# Altium PCB radarr.PcbDoc (part 2 of 3)
Units mm, origin at the board's own origin, x right, y up, seen from the top; angles counter-clockwise.
Board outline 98.42 x 99.44 mm, 4 copper layers (Top Layer, Signal Layer 1, Signal Layer 2, Bottom Layer), stack 1.596 mm thick; 146 components, 99 nets, 534 pads, 3373 vias.
Unrouted connection lines stored in the file: 90.
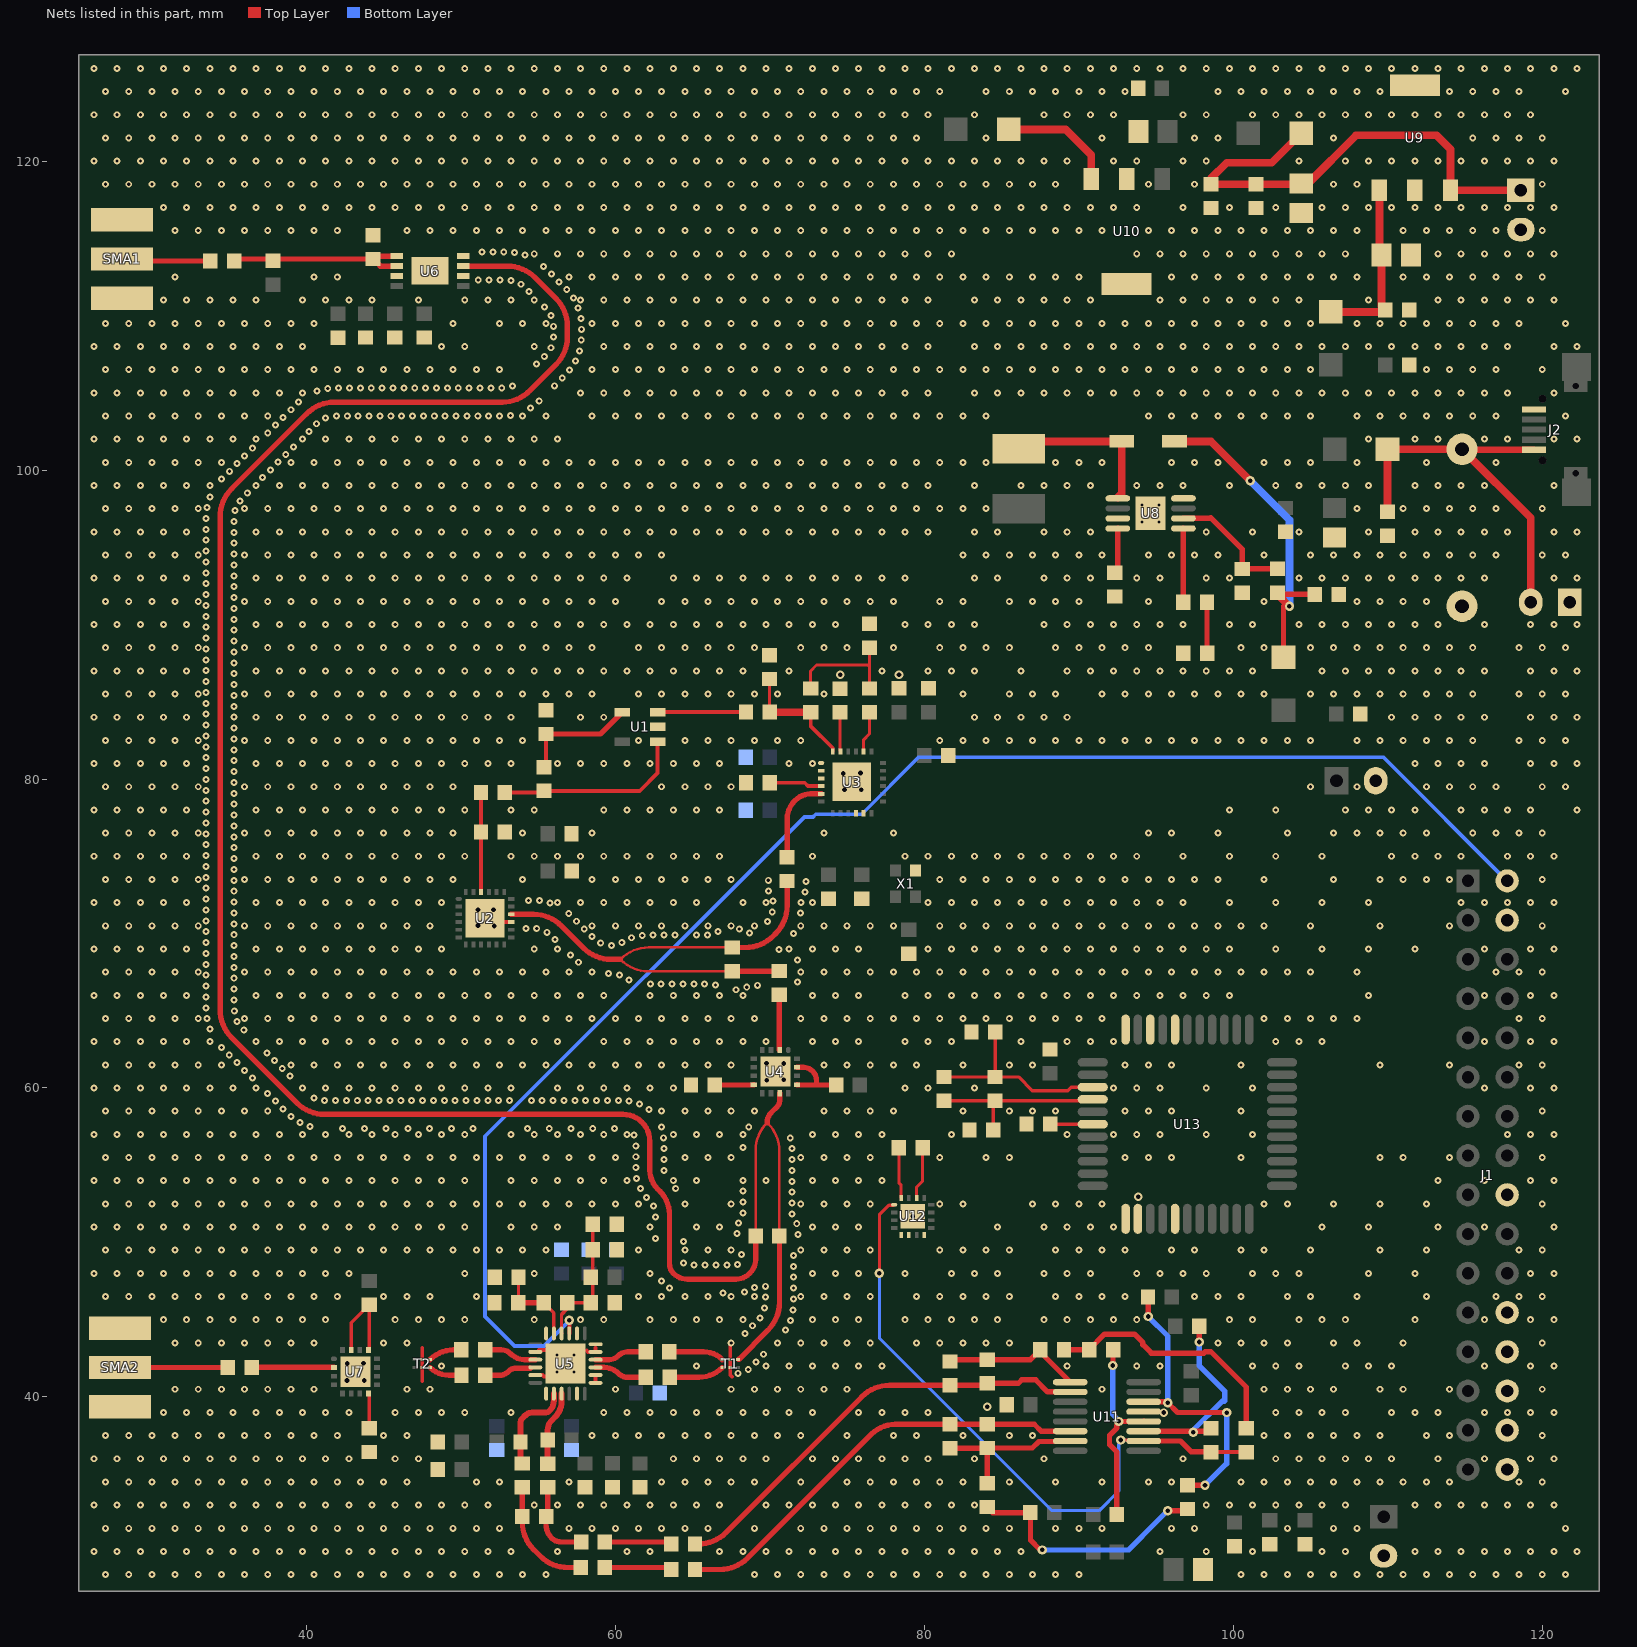
[diagram p4: the nets of this part, all layers, seen from the top]

## Via types
v1: diameter 0.45, hole 0.2, Top Layer to Bottom Layer, tented both sides, 3291 vias
v2: diameter 0.6, hole 0.3, Top Layer to Bottom Layer, tented both sides, 51 vias
v3: diameter 0.559, hole 0.305, Top Layer to Bottom Layer, tented both sides, 23 vias
v4: diameter 0.5, hole 0.2, Top Layer to Bottom Layer, 8 vias

## Nets (pads, with @x,y where several pads share a name; then routed paths per layer and width w, separated by ;. In a path a pad name is that pad's centre, name@x,y a point inside that pad or via, vN(x,y) a via of type N, cw(c..) or ccw(c..) an arc to the next point about the centre after c; other vN are vias at no path point) (continued)
GND: C2.2 C3.2 C4.2 C5.2 C6.1 C9.2 C10.2 C11.2 C12.2 C13.2 C16.1 C17.1 C18.2 C19.2 C21.1 C22.1 C23.2 C25.1 C26.1 C27.1 C28.1 C30.1 C31.1 C32.1 C33.1 C34.1 C35.1 C36.1 C37.1 C39.1 C40.1 C41.2 C42.2 C43.2 C44.2 C45.2 C46.2 C47.2 C48.2 C49.2 C50.2 C51.2 C52.2 C53.2 C54.2 C55.2 C56.2 C57.2 C58.2 C69.2 C70.2 C73.2 C74.1 C75.1 C76.2 D2.A J1.18 J1.25 J1.28 J1.29 J1.30 J1.31 J1.32 J2.5 J3.1 J4.2 J5.2 J6.2 R1.2 R4.1 R9.1 R10.2 R17.2 R18.2 R20.2 R22.2 R35.1 SMA1.2 SMA1.3 SMA2.2 SMA2.3 T1.2 T1.5 T2.2 T2.5 U1.2 U2.15 U2.25 U3.1 U3.2 U3.3 U3.10 U3.11 U3.25 U4.17 U5.1 U5.2 U5.5 U5.6 U5.8 U5.12 U5.14 U5.17 U5.19 U5.23 U5.25 U6.2 U6.4 U6.7 U6.9 U7.17 U8.4 U8.7 U8.9 U9.2 U9.4 U10.2 U10.4 U11.13 U12.5 U12.6 U12.8 U12.17 U13.1 U13.2 U13.5 U13.29 U13.31 U13.33 X1.2 | length 12.2
  Top Layer w0: 58.719,43.18 U5.6@58.719,43.414
  Top Layer w0.25: 47.498,41.021 T2.2@47.498,41.91 T2.5@47.498,42.418 47.498,43.18 ; U2.25@51.562,70.993 51.812,70.743 U2.15@53.262,70.743 ; U5.17@54.819,41.414 55.299,41.414 55.388,41.325 55.93,41.325 U5.25@56.769,42.164 v4(56.219,42.714) 55.882,43.051 55.038,43.051 ; 58.15,43.003 58.239,42.914 U5.5@58.719,42.914 58.719,43.18 ; U5.1@58.719,40.914 U5.2@58.719,41.414 ; v1@67.437,43.307 T1.2@67.437,42.418 T1.5@67.437,41.91 67.437,41.427 67.556,41.308
  Top Layer w0.381: U13.2@93.828,51.533 U13.2@93.908,51.614
  other v1: 27,28.5 28.5,28.5 30,28.5 31.5,28.5 33,28.5 34.5,28.5 36,28.5 37.5,28.5 39,28.5 40.5,28.5 42,28.5 43.5,28.5 45,28.5 46.5,28.5 48,28.5 49.5,28.5 51,28.5 52.5,28.5 54,28.5 55.5,28.5 69,28.5 70.5,28.5 72,28.5 73.5,28.5 75,28.5 76.5,28.5 78,28.5 79.5,28.5 81,28.5 82.5,28.5 84,28.5 85.5,28.5 87,28.5 88.5,28.5 90,28.5 100.5,28.5 102,28.5 103.5,28.5 105,28.5 106.5,28.5 108,28.5 109.5,28.5 111,28.5 112.5,28.5 114,28.5 115.5,28.5 117,28.5 118.5,28.5 120,28.5 121.5,28.5 26.25,30 27.75,30 29.25,30 30.75,30 32.25,30 33.75,30 35.25,30 36.75,30 38.25,30 39.75,30 41.25,30 42.75,30 44.25,30 45.75,30 47.25,30 48.75,30 50.25,30 51.75,30 53.25,30 56.25,30 60.75,30 62.25,30 66.75,30 68.25,30 69.75,30 71.25,30 72.75,30 74.25,30 75.75,30 77.25,30 78.75,30 80.25,30 81.75,30 83.25,30 84.75,30 86.25,30 95.25,30 98.25,30 101.25,30 105.75,30 107.25,30 111.75,30 113.25,30 114.75,30 116.25,30 117.75,30 119.25,30 120.75,30 122.25,30 27,31.5 28.5,31.5 30,31.5 31.5,31.5 33,31.5 34.5,31.5 36,31.5 37.5,31.5 39,31.5 40.5,31.5 42,31.5 43.5,31.5 45,31.5 46.5,31.5 48,31.5 49.5,31.5 51,31.5 52.5,31.5 57,31.5 58.5,31.5 60,31.5 61.5,31.5 63,31.5 64.5,31.5 66,31.5 69,31.5 72,31.5 73.5,31.5 75,31.5 76.5,31.5 78,31.5 79.5,31.5 81,31.5 82.5,31.5 84,31.5 85.5,31.5 88.5,31.5 90,31.5 91.5,31.5 96,31.5 97.5,31.5 103.5,31.5 106.5,31.5 108,31.5 121.5,31.5 26.25,33 27.75,33 29.25,33 30.75,33 32.25,33 33.75,33 35.25,33 36.75,33 38.25,33 39.75,33 41.25,33 42.75,33 44.25,33 45.75,33 47.25,33 48.75,33 50.25,33 51.75,33 54.75,33 56.25,33 57.75,33 59.25,33 60.75,33 62.25,33 63.75,33 65.25,33 66.75,33 69.75,33 71.25,33 72.75,33 74.25,33 75.75,33 77.25,33 78.75,33 80.25,33 81.75,33 83.25,33 98.25,33 99.75,33 101.25,33 102.75,33 104.25,33 105.75,33 107.25,33 111.75,33 113.25,33 114.75,33 116.25,33 117.75,33 119.25,33 120.75,33 27,34.5 28.5,34.5 30,34.5 31.5,34.5 33,34.5 34.5,34.5 36,34.5 37.5,34.5 39,34.5 40.5,34.5 42,34.5 43.5,34.5 45,34.5 46.5,34.5 51,34.5 52.5,34.5 57,34.5 63,34.5 64.5,34.5 66,34.5 67.5,34.5 69,34.5 72,34.5 75,34.5 76.5,34.5 78,34.5 79.5,34.5 81,34.5 82.5,34.5 85.5,34.5 88.5,34.5 91.5,34.5 94.5,34.5 96,34.5 100.5,34.5 102,34.5 103.5,34.5 105,34.5 106.5,34.5 108,34.5 109.5,34.5 111,34.5 112.5,34.5 114,34.5 118.5,34.5 120,34.5 26.25,36 27.75,36 29.25,36 30.75,36 32.25,36 33.75,36 35.25,36 36.75,36 38.25,36 39.75,36 41.25,36 42.75,36 45.75,36 47.25,36 63.75,36 65.25,36 66.75,36 68.25,36 69.75,36 72.75,36 74.25,36 75.75,36 77.25,36 78.75,36 80.25,36 83.25,36 87.75,36 96.75,36 102.75,36 104.25,36 105.75,36 107.25,36 108.75,36 110.25,36 113.25,36 116.25,36 119.25,36 120.75,36 27,37.5 28.5,37.5 30,37.5 31.5,37.5 33,37.5 34.5,37.5 36,37.5 37.5,37.5 39,37.5 40.5,37.5 42,37.5 45,37.5 46.5,37.5 58.5,37.5 60,37.5 61.5,37.5 63,37.5 64.5,37.5 66,37.5 67.5,37.5 69,37.5 70.5,37.5 72,37.5 75,37.5 78,37.5 79.5,37.5 82.5,37.5 85.5,37.5 87,37.5 102,37.5 103.5,37.5 105,37.5 106.5,37.5 108,37.5 109.5,37.5 112.5,37.5 114,37.5 120,37.5 30.75,39 32.25,39 33.75,39 35.25,39 36.75,39 38.25,39 39.75,39 41.25,39 42.75,39 45.75,39 47.25,39 48.75,39 50.25,39 53.25,39 59.25,39 60.75,39 62.25,39 63.75,39 65.25,39 66.75,39 68.25,39 69.75,39 71.25,39 72.75,39 75.75,39 77.25,39 78.75,39 80.25,39 102.75,39 104.25,39 105.75,39 107.25,39 110.25,39 111.75,39 113.25,39 116.25,39 117.75,39 119.25,39 120.75,39 31.5,40.5 33,40.5 34.5,40.5 36,40.5 37.5,40.5 39,40.5 40.5,40.5 46.5,40.5 48,40.5 60,40.5 67.5,40.5 69,40.5 70.5,40.5 72,40.5 73.5,40.5 75,40.5 91.5,40.5 102,40.5 103.5,40.5 105,40.5 106.5,40.5 109.5,40.5 111,40.5 114,40.5 120,40.5 67.941,41.533 68.602,41.774 48.75,42 65.25,42 69.75,42 71.25,42 72.75,42 74.25,42 75.75,42 77.25,42 89.25,42 93.75,42 95.25,42 101.25,42 102.75,42 104.25,42 107.25,42 108.75,42 110.25,42 116.25,42 119.25,42 120.75,42 69.104,42.268 69.601,42.766 31.5,43.5 33,43.5 34.5,43.5 36,43.5 37.5,43.5 39,43.5 40.5,43.5 45,43.5 46.5,43.5 67.5,43.5 70.5,43.5 72,43.5 73.5,43.5 75,43.5 76.5,43.5 79.5,43.5 81,43.5 82.5,43.5 84,43.5 85.5,43.5 99,43.5 100.5,43.5 102,43.5 103.5,43.5 106.5,43.5 108,43.5 111,43.5 120,43.5 68.383,44.113 71.019,44.325 68.88,44.611 71.327,44.959 30.75,45 32.25,45 33.75,45 35.25,45 36.75,45 38.25,45 39.75,45 41.25,45 45.75,45 47.25,45 48.75,45 50.25,45 54.75,45 57.75,45 59.25,45 62.25,45 63.75,45 65.25,45 66.75,45 68.25,45 72.75,45 74.25,45 75.75,45 78.75,45 80.25,45 81.75,45 83.25,45 84.75,45 87.75,45 89.25,45 90.75,45 92.25,45 93.75,45 99.75,45 101.25,45 104.25,45 105.75,45 107.25,45 111.75,45 116.25,45 119.25,45 120.75,45 69.363,45.124 71.497,45.642 69.667,45.759 71.527,46.345 69.713,46.461 27,46.5 28.5,46.5 30,46.5 31.5,46.5 33,46.5 34.5,46.5 36,46.5 37.5,46.5 39,46.5 40.5,46.5 42,46.5 45,46.5 46.5,46.5 48,46.5 51,46.5 61.5,46.5 63,46.5 64.5,46.5 66,46.5 67.5,46.5 69,46.5 72,46.5 73.5,46.5 75,46.5 76.5,46.5 79.5,46.5 81,46.5 82.5,46.5 84,46.5 85.5,46.5 88.5,46.5 90,46.5 91.5,46.5 93,46.5 97.5,46.5 99,46.5 100.5,46.5 103.5,46.5 105,46.5 108,46.5 112.5,46.5 117,46.5 118.5,46.5 120,46.5 66.969,46.718 68.372,46.8 63.506,47.05 71.527,47.049 69.013,47.092 69.713,47.165 62.98,47.518 71.527,47.753 26.25,48 27.75,48 29.25,48 30.75,48 32.25,48 33.75,48 35.25,48 36.75,48 38.25,48 39.75,48 41.25,48 42.75,48 50.25,48 54.75,48 62.25,48 72.75,48 74.25,48 75.75,48 78.75,48 81.75,48 83.25,48 84.75,48 87.75,48 89.25,48 90.75,48 93.75,48 95.25,48 96.75,48 98.25,48 101.25,48 102.75,48 104.25,48 108.75,48 111.75,48 119.25,48 120.75,48 71.527,48.457 65.104,48.532 65.808,48.532 66.512,48.532 67.216,48.532 67.919,48.564 64.412,48.66 71.527,49.161 68.173,49.221 27,49.5 28.5,49.5 30,49.5 31.5,49.5 33,49.5 34.5,49.5 36,49.5 37.5,49.5 39,49.5 40.5,49.5 42,49.5 43.5,49.5 45,49.5 46.5,49.5 48,49.5 49.5,49.5 51,49.5 52.5,49.5 54,49.5 55.5,49.5 61.5,49.5 64.5,49.5 66,49.5 67.5,49.5 72,49.5 73.5,49.5 75,49.5 76.5,49.5 81,49.5 82.5,49.5 84,49.5 85.5,49.5 88.5,49.5 90,49.5 91.5,49.5 93,49.5 96,49.5 97.5,49.5 100.5,49.5 102,49.5 105,49.5 109.5,49.5 112.5,49.5 118.5,49.5 120,49.5 64.407,50.068 62.593,50.253 71.816,50.514 67.884,50.571 26.25,51 27.75,51 29.25,51 30.75,51 32.25,51 33.75,51 35.25,51 36.75,51 38.25,51 39.75,51 41.25,51 42.75,51 44.25,51 45.75,51 47.25,51 48.75,51 50.25,51 53.25,51 54.75,51 56.25,51 62.25,51 65.25,51 66.75,51 72.75,51 74.25,51 75.75,51 84.75,51 87.75,51 89.25,51 90.75,51 92.25,51 105.75,51 108.75,51 113.25,51 116.25,51 120.75,51 71.743,51.214 67.979,51.268 62.593,51.661 71.438,51.848 68.262,51.913 62.461,52.353 27,52.5 28.5,52.5 30,52.5 31.5,52.5 33,52.5 34.5,52.5 36,52.5 37.5,52.5 39,52.5 40.5,52.5 42,52.5 43.5,52.5 45,52.5 46.5,52.5 48,52.5 49.5,52.5 51,52.5 52.5,52.5 54,52.5 55.5,52.5 57,52.5 58.5,52.5 60,52.5 61.5,52.5 64.5,52.5 67.5,52.5 72,52.5 73.5,52.5 75,52.5 76.5,52.5 81,52.5 82.5,52.5 87,52.5 88.5,52.5 90,52.5 91.5,52.5 102,52.5 103.5,52.5 106.5,52.5 109.5,52.5 112.5,52.5 120,52.5 71.438,52.552 68.262,52.617 62.021,52.903 71.438,53.256 68.262,53.321 61.621,53.482 63.908,53.494 71.438,53.96 26.25,54 27.75,54 29.25,54 30.75,54 32.25,54 33.75,54 35.25,54 36.75,54 38.25,54 39.75,54 41.25,54 42.75,54 44.25,54 45.75,54 47.25,54 48.75,54 50.25,54 53.25,54 54.75,54 56.25,54 57.75,54 59.25,54 60.75,54 63.75,54 65.25,54 68.25,54 69.75,54 72.75,54 74.25,54 75.75,54 77.25,54 113.25,54 116.25,54 119.25,54 120.75,54 61.379,54.143 63.145,54.666 71.438,54.664 61.323,54.845 63.137,55.37 71.438,55.368 27,55.5 28.5,55.5 30,55.5 31.5,55.5 33,55.5 34.5,55.5 36,55.5 37.5,55.5 39,55.5 40.5,55.5 42,55.5 43.5,55.5 45,55.5 46.5,55.5 48,55.5 49.5,55.5 51,55.5 52.5,55.5 54,55.5 55.5,55.5 57,55.5 58.5,55.5 60,55.5 64.5,55.5 66,55.5 67.5,55.5 72,55.5 73.5,55.5 75,55.5 76.5,55.5 81,55.5 84,55.5 85.5,55.5 93,55.5 94.5,55.5 96,55.5 100.5,55.5 109.5,55.5 111,55.5 114,55.5 120,55.5 61.323,55.549 63.137,56.074 71.432,56.072 68.27,56.137 61.323,56.253 63.125,56.777 71.322,56.768 61.215,56.948 26.25,57 27.75,57 29.25,57 30.75,57 32.25,57 33.75,57 35.25,57 36.75,57 38.25,57 39.75,57 41.25,57 42.75,57 44.25,57 45.75,57 47.25,57 48.75,57 50.25,57 53.25,57 54.75,57 56.25,57 57.75,57 59.25,57 60.75,57 63.75,57 65.25,57 66.75,57 68.25,57 72.75,57 74.25,57 75.75,57 77.25,57 81.75,57 89.25,57 92.25,57 93.75,57 95.25,57 98.25,57 101.25,57 117.75,57 119.25,57 120.75,57 42.344,57.386 43.752,57.386 45.16,57.386 46.568,57.386 47.976,57.386 49.384,57.386 50.792,57.386 54.312,57.386 55.72,57.386 57.128,57.386 58.536,57.386 59.944,57.386 62.977,57.466 68.635,57.488 40.242,57.517 39.588,57.776 39.002,58.167 27,58.5 28.5,58.5 30,58.5 31.5,58.5 33,58.5 34.5,58.5 36,58.5 37.5,58.5 63,58.5 64.5,58.5 66,58.5 67.5,58.5 69,58.5 73.5,58.5 75,58.5 76.5,58.5 78,58.5 82.5,58.5 85.5,58.5 87,58.5 88.5,58.5 93,58.5 94.5,58.5 96,58.5 100.5,58.5 120,58.5 62.167,58.6 38.491,58.651 61.571,58.975 37.993,59.149 60.894,59.17 41.183,59.202 41.887,59.2 42.591,59.2 43.295,59.2 43.999,59.2 44.703,59.2 45.407,59.2 46.111,59.2 46.815,59.2 47.519,59.2 48.223,59.2 48.927,59.2 49.631,59.2 50.335,59.2 51.039,59.2 51.743,59.2 52.447,59.2 53.151,59.2 54.559,59.2 55.263,59.2 55.967,59.2 56.671,59.2 57.375,59.2 58.079,59.2 58.783,59.2 59.487,59.2 60.191,59.2 40.497,59.359 37.495,59.647 26.25,60 27.75,60 29.25,60 30.75,60 32.25,60 33.75,60 35.25,60 36.75,60 39.75,60 41.25,60 42.75,60 44.25,60 45.75,60 47.25,60 48.75,60 50.25,60 51.75,60 53.25,60 56.25,60 57.75,60 59.25,60 60.75,60 62.25,60 63.75,60 78.75,60 80.25,60 83.25,60 92.25,60 93.75,60 95.25,60 98.25,60 101.25,60 116.25,60 119.25,60 120.75,60 36.5,60.642 38.935,60.773 36.002,61.14 38.437,61.271 27,61.5 28.5,61.5 30,61.5 31.5,61.5 33,61.5 34.5,61.5 39,61.5 40.5,61.5 42,61.5 43.5,61.5 45,61.5 46.5,61.5 48,61.5 49.5,61.5 51,61.5 52.5,61.5 54,61.5 55.5,61.5 57,61.5 58.5,61.5 60,61.5 61.5,61.5 63,61.5 64.5,61.5 66,61.5 67.5,61.5 73.5,61.5 75,61.5 76.5,61.5 78,61.5 79.5,61.5 82.5,61.5 85.5,61.5 87,61.5 93,61.5 94.5,61.5 96,61.5 100.5,61.5 109.5,61.5 114,61.5 118.5,61.5 120,61.5 35.504,61.638 37.939,61.769 35.006,62.136 37.441,62.267 34.506,62.631 26.25,63 27.75,63 29.25,63 30.75,63 32.25,63 33.75,63 36.75,63 38.25,63 39.75,63 41.25,63 42.75,63 44.25,63 45.75,63 47.25,63 48.75,63 50.25,63 51.75,63 53.25,63 54.75,63 56.25,63 59.25,63 60.75,63 62.25,63 63.75,63 65.25,63 66.75,63 68.25,63 69.75,63 72.75,63 74.25,63 75.75,63 78.75,63 80.25,63 81.75,63 86.25,63 89.25,63 90.75,63 92.25,63 102.75,63 104.25,63 105.75,63 116.25,63 119.25,63 120.75,63 35.948,63.76 33.748,63.809 35.515,64.315 27,64.5 28.5,64.5 30,64.5 31.5,64.5 33,64.5 33.556,64.487 36,64.5 37.5,64.5 39,64.5 40.5,64.5 42,64.5 43.5,64.5 45,64.5 46.5,64.5 48,64.5 49.5,64.5 51,64.5 52.5,64.5 54,64.5 55.5,64.5 57,64.5 58.5,64.5 60,64.5 61.5,64.5 63,64.5 64.5,64.5 66,64.5 67.5,64.5 69,64.5 72,64.5 73.5,64.5 75,64.5 76.5,64.5 78,64.5 79.5,64.5 81,64.5 82.5,64.5 84,64.5 85.5,64.5 87,64.5 88.5,64.5 90,64.5 91.5,64.5 102,64.5 103.5,64.5 105,64.5 106.5,64.5 108,64.5 118.5,64.5 120,64.5 35.332,64.995 33.51,65.189 35.324,65.699 33.51,65.893 26.25,66 27.75,66 29.25,66 30.75,66 32.25,66 36.75,66 38.25,66 39.75,66 41.25,66 42.75,66 44.25,66 45.75,66 47.25,66 48.75,66 50.25,66 51.75,66 53.25,66 54.75,66 56.25,66 57.75,66 59.25,66 62.25,66 63.75,66 65.25,66 66.75,66 68.25,66 72.75,66 74.25,66 75.75,66 78.75,66 80.25,66 81.75,66 83.25,66 84.75,66 86.25,66 87.75,66 89.25,66 90.75,66 92.25,66 93.75,66 95.25,66 96.75,66 98.25,66 99.75,66 108.75,66 116.25,66 119.25,66 120.75,66 67.821,66.36 35.324,66.403 68.505,66.523 33.51,66.597 69.198,66.649 66.484,66.669 62.264,66.738 62.968,66.738 63.672,66.738 64.376,66.738 65.08,66.738 65.784,66.738 71.79,66.875 60.885,66.983 35.324,67.107 33.51,67.301 60.264,67.315 59.569,67.424 27,67.5 28.5,67.5 30,67.5 31.5,67.5 33,67.5 36,67.5 37.5,67.5 39,67.5 40.5,67.5 42,67.5 43.5,67.5 45,67.5 46.5,67.5 48,67.5 49.5,67.5 51,67.5 52.5,67.5 54,67.5 55.5,67.5 57,67.5 58.5,67.5 72,67.5 73.5,67.5 75,67.5 76.5,67.5 78,67.5 79.5,67.5 81,67.5 82.5,67.5 84,67.5 85.5,67.5 87,67.5 88.5,67.5 90,67.5 91.5,67.5 93,67.5 94.5,67.5 96,67.5 97.5,67.5 99,67.5 100.5,67.5 102,67.5 103.5,67.5 105,67.5 108,67.5 117,67.5 118.5,67.5 120,67.5 35.324,67.811 33.51,68.005 57.614,68.141 71.786,68.28 35.324,68.515 57.097,68.62 33.51,68.709 70.587,68.954 26.25,69 27.75,69 29.25,69 30.75,69 32.25,69 36.75,69 38.25,69 39.75,69 41.25,69 42.75,69 44.25,69 45.75,69 47.25,69 48.75,69 54.75,69 56.25,69 71.25,69 72.75,69 74.25,69 75.75,69 80.25,69 81.75,69 83.25,69 84.75,69 86.25,69 87.75,69 89.25,69 90.75,69 92.25,69 93.75,69 95.25,69 96.75,69 98.25,69 99.75,69 102.75,69 105.75,69 108.75,69 111.75,69 116.25,69 119.25,69 120.75,69 35.324,69.219 59.74,69.233 59.053,69.385 33.51,69.413 60.416,69.431 56.102,69.615 61.055,69.727 58.484,69.799 61.741,69.883 35.324,69.923 62.444,69.914 63.148,69.914 63.852,69.914 65.26,69.914 65.964,69.914 71.521,70 68.676,70.029 55.573,70.08 33.51,70.117 66.632,70.136 68.023,70.292 54.909,70.314 57.986,70.297 54.205,70.336 27,70.5 28.5,70.5 30,70.5 31.5,70.5 33,70.5 36,70.5 37.5,70.5 39,70.5 40.5,70.5 42,70.5 43.5,70.5 45,70.5 46.5,70.5 48,70.5 58.5,70.5 60,70.5 61.5,70.5 63,70.5 64.5,70.5 66,70.5 67.5,70.5 69,70.5 72,70.5 73.5,70.5 75,70.5 76.5,70.5 78,70.5 81,70.5 82.5,70.5 84,70.5 85.5,70.5 87,70.5 88.5,70.5 90,70.5 91.5,70.5 93,70.5 94.5,70.5 96,70.5 97.5,70.5 99,70.5 100.5,70.5 102,70.5 105,70.5 109.5,70.5 114,70.5 120,70.5 35.324,70.627 69.841,70.769 57.488,70.795 33.51,70.821 56.983,71.286 35.324,71.331 71.997,71.317 70.157,71.398 33.51,71.525 55.768,71.982 26.25,72 27.75,72 29.25,72 30.75,72 32.25,72 36.75,72 38.25,72 39.75,72 41.25,72 42.75,72 44.25,72 45.75,72 47.25,72 48.75,72 56.25,72 57.75,72 59.25,72 60.75,72 62.25,72 63.75,72 65.25,72 68.25,72 69.75,72 72.027,72.021 72.75,72 80.25,72 81.75,72 83.25,72 84.75,72 86.25,72 87.75,72 89.25,72 90.75,72 92.25,72 93.75,72 95.25,72 96.75,72 99.75,72 102.75,72 105.75,72 108.75,72 114.75,72 116.25,72 117.75,72 119.25,72 120.75,72 35.324,72.035 70.213,72.099 55.079,72.128 54.376,72.15 33.51,72.229 72.288,72.675 35.324,72.739 69.925,72.742 33.51,72.933 72.341,73.377 35.324,73.443 69.899,73.445 27,73.5 28.5,73.5 30,73.5 31.5,73.5 33,73.5 36,73.5 37.5,73.5 39,73.5 40.5,73.5 42,73.5 43.5,73.5 45,73.5 46.5,73.5 48,73.5 49.5,73.5 54,73.5 58.5,73.5 60,73.5 61.5,73.5 63,73.5 64.5,73.5 66,73.5 67.5,73.5 81,73.5 82.5,73.5 84,73.5 85.5,73.5 87,73.5 88.5,73.5 90,73.5 91.5,73.5 93,73.5 94.5,73.5 96,73.5 97.5,73.5 99,73.5 102,73.5 106.5,73.5 109.5,73.5 111,73.5 112.5,73.5 114,73.5 120,73.5 33.51,73.637 35.324,74.147 33.51,74.341 35.324,74.851 26.25,75 27.75,75 29.25,75 30.75,75 32.25,75 36.75,75 38.25,75 39.75,75 41.25,75 42.75,75 44.25,75 45.75,75 47.25,75 48.75,75 50.25,75 53.25,75 54.75,75 56.25,75 57.75,75 59.25,75 60.75,75 62.25,75 63.75,75 65.25,75 66.75,75 72.75,75 78.75,75 80.25,75 81.75,75 83.25,75 84.75,75 86.25,75 87.75,75 89.25,75 90.75,75 92.25,75 93.75,75 96.75,75 99.75,75 102.75,75 105.75,75 110.25,75 111.75,75 113.25,75 114.75,75 117.75,75 119.25,75 120.75,75 33.51,75.045 35.324,75.555 33.51,75.749 35.324,76.259 33.51,76.453 27,76.5 28.5,76.5 30,76.5 31.5,76.5 33,76.5 36,76.5 37.5,76.5 39,76.5 40.5,76.5 42,76.5 43.5,76.5 45,76.5 46.5,76.5 48,76.5 49.5,76.5 54,76.5 58.5,76.5 73.5,76.5 78,76.5 94.5,76.5 96,76.5 99,76.5 103.5,76.5 106.5,76.5 108,76.5 109.5,76.5 111,76.5 112.5,76.5 115.5,76.5 117,76.5 118.5,76.5 120,76.5 35.324,76.963 33.51,77.157 35.324,77.667 33.51,77.861 26.25,78 27.75,78 29.25,78 30.75,78 32.25,78 36.75,78 38.25,78 39.75,78 41.25,78 42.75,78 44.25,78 45.75,78 47.25,78 48.75,78 50.25,78 53.25,78 54.75,78 59.25,78 60.75,78 62.25,78 63.75,78 65.25,78 66.75,78 99.75,78 102.75,78 107.25,78 108.75,78 110.25,78 111.75,78 114.75,78 116.25,78 117.75,78 119.25,78 122.25,78 35.324,78.371 33.51,78.565 35.324,79.075 33.51,79.269 27,79.5 28.5,79.5 30,79.5 31.5,79.5 33,79.5 36,79.5 37.5,79.5 39,79.5 40.5,79.5 42,79.5 43.5,79.5 45,79.5 46.5,79.5 48,79.5 49.5,79.5 63,79.5 64.5,79.5 66,79.5 67.5,79.5 105,79.5 108,79.5 112.5,79.5 114,79.5 115.5,79.5 117,79.5 120,79.5 121.5,79.5 35.324,79.779 33.51,79.973 35.324,80.483 33.51,80.677 26.25,81 27.75,81 29.25,81 30.75,81 32.25,81 36.75,81 38.25,81 39.75,81 41.25,81 42.75,81 44.25,81 45.75,81 47.25,81 48.75,81 50.25,81 51.75,81 53.25,81 56.25,81 57.75,81 59.25,81 60.75,81 62.25,81 63.75,81 65.25,81 66.75,81 71.25,81 72.75,81 111.75,81 113.25,81 114.75,81 116.25,81 119.25,81 120.75,81 122.25,81 35.324,81.187 33.51,81.381 35.324,81.891 33.51,82.085 27,82.5 28.5,82.5 30,82.5 31.5,82.5 33,82.5 36,82.5 37.5,82.5 39,82.5 40.5,82.5 42,82.5 43.5,82.5 45,82.5 46.5,82.5 48,82.5 49.5,82.5 51,82.5 52.5,82.5 54,82.5 61.5,82.5 64.5,82.5 66,82.5 67.5,82.5 69,82.5 70.5,82.5 72,82.5 81,82.5 82.5,82.5 84,82.5 85.5,82.5 87,82.5 88.5,82.5 90,82.5 91.5,82.5 93,82.5 94.5,82.5 96,82.5 97.5,82.5 99,82.5 100.5,82.5 102,82.5 103.5,82.5 105,82.5 108,82.5 109.5,82.5 111,82.5 112.5,82.5 114,82.5 115.5,82.5 118.5,82.5 120,82.5 121.5,82.5 35.324,82.595 33.51,82.789 35.324,83.299 33.51,83.493 26.25,84 27.75,84 29.25,84 30.75,84 32.25,84 35.324,84.003 36.75,84 38.25,84 39.75,84 41.25,84 42.75,84 44.25,84 45.75,84 47.25,84 48.75,84 50.25,84 51.75,84 53.25,84 57.75,84 59.25,84 83.25,84 84.75,84 86.25,84 87.75,84 89.25,84 110.25,84 111.75,84 113.25,84 114.75,84 116.25,84 119.25,84 120.75,84 122.25,84 33.51,84.197 35.324,84.707 33.51,84.901 35.324,85.411 27,85.5 28.5,85.5 30,85.5 31.5,85.5 33,85.5 36,85.5 37.5,85.5 39,85.5 40.5,85.5 42,85.5 43.5,85.5 45,85.5 46.5,85.5 48,85.5 49.5,85.5 51,85.5 52.5,85.5 54,85.5 55.5,85.5 57,85.5 58.5,85.5 61.5,85.5 63,85.5 64.5,85.5 66,85.5 67.5,85.5 69,85.5 70.5,85.5 73.5,85.5 82.5,85.5 85.5,85.5 87,85.5 88.5,85.5 91.5,85.5 93,85.5 94.5,85.5 96,85.5 97.5,85.5 99,85.5 100.5,85.5 102,85.5 105,85.5 106.5,85.5 108,85.5 109.5,85.5 111,85.5 112.5,85.5 114,85.5 115.5,85.5 118.5,85.5 120,85.5 121.5,85.5 33.51,85.605 35.324,86.115 33.51,86.309 35.324,86.819 26.25,87 27.75,87 29.25,87 30.75,87 32.25,87 36.75,87 38.25,87 39.75,87 41.25,87 42.75,87 44.25,87 45.75,87 47.25,87 48.75,87 50.25,87 51.75,87 53.25,87 54.75,87 56.25,87 57.75,87 59.25,87 60.75,87 62.25,87 63.75,87 65.25,87 66.75,87 68.25,87 71.25,87 77.25,87 80.25,87 81.75,87 83.25,87 86.25,87 89.25,87 90.75,87 92.25,87 93.75,87 95.25,87 96.75,87 98.25,87 99.75,87 101.25,87 105.75,87 107.25,87 108.75,87 110.25,87 111.75,87 113.25,87 114.75,87 116.25,87 119.25,87 120.75,87 122.25,87 33.51,87.013 35.324,87.523 33.51,87.717 35.324,88.227 33.51,88.421 27,88.5 28.5,88.5 30,88.5 31.5,88.5 33,88.5 36,88.5 37.5,88.5 39,88.5 40.5,88.5 42,88.5 43.5,88.5 45,88.5 46.5,88.5 48,88.5 49.5,88.5 51,88.5 52.5,88.5 54,88.5 55.5,88.5 57,88.5 58.5,88.5 61.5,88.5 63,88.5 64.5,88.5 66,88.5 67.5,88.5 69,88.5 72,88.5 73.5,88.5 75,88.5 78,88.5 81,88.5 82.5,88.5 84,88.5 85.5,88.5 88.5,88.5 90,88.5 91.5,88.5 93,88.5 94.5,88.5 100.5,88.5 102,88.5 105,88.5 106.5,88.5 108,88.5 109.5,88.5 111,88.5 112.5,88.5 114,88.5 115.5,88.5 118.5,88.5 120,88.5 121.5,88.5 35.324,88.931 33.51,89.125 35.324,89.635 33.51,89.829 26.25,90 27.75,90 29.25,90 30.75,90 32.25,90 36.75,90 38.25,90 39.75,90 41.25,90 42.75,90 44.25,90 45.75,90 47.25,90 48.75,90 50.25,90 51.75,90 53.25,90 54.75,90 56.25,90 57.75,90 59.25,90 60.75,90 62.25,90 63.75,90 65.25,90 66.75,90 68.25,90 69.75,90 71.25,90 72.75,90 74.25,90 78.75,90 80.25,90 81.75,90 83.25,90 87.75,90 89.25,90 90.75,90 92.25,90 93.75,90 95.25,90 96.75,90 99.75,90 101.25,90 104.25,90 105.75,90 107.25,90 108.75,90 110.25,90 111.75,90 113.25,90 116.25,90 119.25,90 120.75,90 122.25,90 35.324,90.339 33.51,90.533 35.324,91.043 33.51,91.237 27,91.5 28.5,91.5 30,91.5 31.5,91.5 33,91.5 36,91.5 37.5,91.5 39,91.5 40.5,91.5 42,91.5 43.5,91.5 45,91.5 46.5,91.5 48,91.5 49.5,91.5 51,91.5 52.5,91.5 54,91.5 55.5,91.5 57,91.5 58.5,91.5 60,91.5 63,91.5 64.5,91.5 66,91.5 67.5,91.5 69,91.5 70.5,91.5 72,91.5 73.5,91.5 75,91.5 76.5,91.5 78,91.5 81,91.5 82.5,91.5 85.5,91.5 87,91.5 88.5,91.5 90,91.5 94.5,91.5 102,91.5 108,91.5 109.5,91.5 111,91.5 112.5,91.5 35.324,91.747 33.51,91.941 35.324,92.451 33.51,92.645 26.25,93 27.75,93 29.25,93 30.75,93 32.25,93 36.75,93 38.25,93 39.75,93 41.25,93 42.75,93 44.25,93 45.75,93 47.25,93 48.75,93 50.25,93 51.75,93 53.25,93 54.75,93 56.25,93 57.75,93 59.25,93 60.75,93 63.75,93 65.25,93 66.75,93 68.25,93 69.75,93 71.25,93 72.75,93 74.25,93 75.75,93 77.25,93 78.75,93 83.25,93 84.75,93 87.75,93 89.25,93 90.75,93 93.75,93 95.25,93 98.25,93 99.75,93 104.25,93 105.75,93 107.25,93 108.75,93 110.25,93 111.75,93 113.25,93 114.75,93 116.25,93 120.75,93 122.25,93 35.324,93.155 33.51,93.349 35.324,93.859 33.51,94.053 27,94.5 28.5,94.5 30,94.5 31.5,94.5 33,94.5 36,94.5 37.5,94.5 39,94.5 40.5,94.5 42,94.5 43.5,94.5 45,94.5 46.5,94.5 48,94.5 49.5,94.5 51,94.5 52.5,94.5 54,94.5 55.5,94.5 57,94.5 58.5,94.5 60,94.5 61.5,94.5 63,94.5 82.5,94.5 84,94.5 85.5,94.5 87,94.5 88.5,94.5 90,94.5 91.5,94.5 94.5,94.5 96,94.5 97.5,94.5 99,94.5 102,94.5 105,94.5 106.5,94.5 108,94.5 109.5,94.5 111,94.5 112.5,94.5 114,94.5 115.5,94.5 117,94.5 120,94.5 121.5,94.5 35.324,94.563 33.51,94.757 35.324,95.267 33.51,95.461 35.324,95.971 26.25,96 27.75,96 29.25,96 30.75,96 32.25,96 36.75,96 38.25,96 39.75,96 41.25,96 42.75,96 44.25,96 45.75,96 47.25,96 48.75,96 50.25,96 51.75,96 53.25,96 54.75,96 56.25,96 57.75,96 59.25,96 60.75,96 62.25,96 63.75,96 65.25,96 66.75,96 68.25,96 69.75,96 71.25,96 72.75,96 74.25,96 75.75,96 77.25,96 78.75,96 80.25,96 83.25,96 84.75,96 87.75,96 89.25,96 90.75,96 98.25,96 101.25,96 104.25,96 108.75,96 111.75,96 113.25,96 114.75,96 116.25,96 117.75,96 120.75,96 122.25,96 33.51,96.165 35.324,96.675 33.51,96.869 35.377,97.377 27,97.5 28.5,97.5 30,97.5 31.5,97.5 33,97.5 36,97.5 37.5,97.5 39,97.5 40.5,97.5 42,97.5 43.5,97.5 45,97.5 46.5,97.5 48,97.5 49.5,97.5 51,97.5 52.5,97.5 54,97.5 55.5,97.5 57,97.5 58.5,97.5 60,97.5 61.5,97.5 63,97.5 64.5,97.5 66,97.5 67.5,97.5 69,97.5 70.5,97.5 72,97.5 73.5,97.5 75,97.5 76.5,97.5 78,97.5 79.5,97.5 81,97.5 82.5,97.5 84,97.5 108,97.5 111,97.5 112.5,97.5 114,97.5 115.5,97.5 117,97.5 120,97.5 33.557,97.572 35.69,98.007 33.75,98.249 36.174,98.518 26.25,99 27.75,99 29.25,99 30.75,99 32.25,99 33.75,99 36.75,99 38.25,99 39.75,99 41.25,99 42.75,99 44.25,99 45.75,99 47.25,99 48.75,99 50.25,99 51.75,99 53.25,99 54.75,99 56.25,99 57.75,99 59.25,99 60.75,99 62.25,99 63.75,99 65.25,99 66.75,99 68.25,99 69.75,99 71.25,99 72.75,99 74.25,99 75.75,99 77.25,99 78.75,99 80.25,99 83.25,99 86.25,99 87.75,99 89.25,99 90.75,99 93.75,99 95.25,99 96.75,99 99.75,99 102.75,99 104.25,99 105.75,99 107.25,99 108.75,99 111.75,99 113.25,99 114.75,99 116.25,99 120.75,99 34.51,99.426 37.17,99.514 35.011,99.921 37.668,100.012 35.509,100.418 27,100.5 28.5,100.5 30,100.5 31.5,100.5 33,100.5 34.5,100.5 38.165,100.509 39,100.5 40.5,100.5 42,100.5 43.5,100.5 45,100.5 46.5,100.5 48,100.5 49.5,100.5 51,100.5 52.5,100.5 54,100.5 55.5,100.5 57,100.5 58.5,100.5 60,100.5 61.5,100.5 63,100.5 64.5,100.5 66,100.5 67.5,100.5 69,100.5 70.5,100.5 72,100.5 73.5,100.5 75,100.5 76.5,100.5 78,100.5 79.5,100.5 81,100.5 82.5,100.5 84,100.5 88.5,100.5 90,100.5 91.5,100.5 96,100.5 97.5,100.5 99,100.5 102,100.5 103.5,100.5 105,100.5 108,100.5 112.5,100.5 117,100.5 36.006,100.916 38.663,101.007 36.504,101.414 39.161,101.505 26.25,102 27.75,102 29.25,102 30.75,102 32.25,102 33.75,102 35.25,102 36.75,102 39.75,102 41.25,102 42.75,102 44.25,102 45.75,102 47.25,102 48.75,102 50.25,102 51.75,102 53.25,102 54.75,102 56.25,102 108.75,102 111.75,102 113.25,102 116.25,102 117.75,102 120.75,102 122.25,102 37.5,102.41 40.157,102.501 37.998,102.907 40.654,102.998 41.248,103.377 38.495,103.405 41.943,103.487 42.647,103.487 43.351,103.487 44.055,103.487 44.759,103.487 45.463,103.487 46.167,103.487 46.871,103.487 47.575,103.487 48.279,103.487 48.983,103.487 49.687,103.487 50.391,103.487 51.095,103.487 51.799,103.487 52.503,103.487 27,103.5 28.5,103.5 30,103.5 31.5,103.5 33,103.5 34.5,103.5 36,103.5 37.5,103.5 54,103.5 55.5,103.5 58.5,103.5 60,103.5 61.5,103.5 63,103.5 64.5,103.5 66,103.5 67.5,103.5 69,103.5 70.5,103.5 72,103.5 73.5,103.5 75,103.5 76.5,103.5 78,103.5 79.5,103.5 81,103.5 82.5,103.5 84,103.5 94.5,103.5 96,103.5 97.5,103.5 99,103.5 100.5,103.5 102,103.5 103.5,103.5 105,103.5 108,103.5 109.5,103.5 111,103.5 112.5,103.5 114,103.5 115.5,103.5 117,103.5 121.5,103.5 53.206,103.529 38.993,103.903 54.515,104.027 39.494,104.397 55.071,104.458 26.25,105 27.75,105 29.25,105 30.75,105 32.25,105 33.75,105 35.25,105 36.75,105 38.25,105 39.75,105 57.75,105 59.25,105 60.75,105 62.25,105 63.75,105 65.25,105 66.75,105 68.25,105 69.75,105 71.25,105 72.75,105 74.25,105 75.75,105 77.25,105 78.75,105 80.25,105 83.25,105 84.75,105 86.25,105 87.75,105 89.25,105 90.75,105 92.25,105 93.75,105 95.25,105 96.75,105 98.25,105 99.75,105 101.25,105 102.75,105 104.25,105 105.75,105 107.25,105 108.75,105 110.25,105 111.75,105 113.25,105 114.75,105 116.25,105 117.75,105 120.75,105 40.697,105.117 41.383,105.274 42.087,105.301 42.791,105.301 43.495,105.301 44.199,105.301 44.903,105.301 45.607,105.301 46.311,105.301 47.015,105.301 47.719,105.301 48.423,105.301 49.127,105.301 49.831,105.301 50.535,105.301 51.239,105.301 51.943,105.301 52.647,105.301 53.335,105.449 56.065,105.455 56.563,105.953 57.045,106.467 27,106.5 28.5,106.5 30,106.5 31.5,106.5 33,106.5 34.5,106.5 36,106.5 37.5,106.5 39,106.5 40.5,106.5 42,106.5 43.5,106.5 45,106.5 46.5,106.5 48,106.5 49.5,106.5 51,106.5 52.5,106.5 58.5,106.5 60,106.5 61.5,106.5 63,106.5 64.5,106.5 66,106.5 67.5,106.5 69,106.5 70.5,106.5 72,106.5 73.5,106.5 75,106.5 76.5,106.5 78,106.5 79.5,106.5 81,106.5 82.5,106.5 84,106.5 85.5,106.5 87,106.5 88.5,106.5 90,106.5 91.5,106.5 93,106.5 94.5,106.5 96,106.5 97.5,106.5 99,106.5 100.5,106.5 102,106.5 103.5,106.5 105,106.5 112.5,106.5 114,106.5 115.5,106.5 117,106.5 120,106.5 54.901,106.857 57.428,107.057 55.399,107.355 57.68,107.715 55.821,107.918 26.25,108 27.75,108 29.25,108 30.75,108 32.25,108 33.75,108 35.25,108 36.75,108 38.25,108 39.75,108 48.75,108 50.25,108 54.75,108 59.25,108 60.75,108 62.25,108 63.75,108 65.25,108 66.75,108 68.25,108 69.75,108 71.25,108 72.75,108 74.25,108 75.75,108 77.25,108 78.75,108 80.25,108 83.25,108 84.75,108 86.25,108 87.75,108 89.25,108 90.75,108 92.25,108 93.75,108 95.25,108 96.75,108 98.25,108 99.75,108 101.25,108 102.75,108 104.25,108 105.75,108 107.25,108 108.75,108 110.25,108 111.75,108 113.25,108 114.75,108 116.25,108 117.75,108 120.75,108 122.25,108 57.794,108.409 55.986,108.603 57.803,109.113 55.988,109.307 27,109.5 28.5,109.5 30,109.5 31.5,109.5 33,109.5 34.5,109.5 36,109.5 37.5,109.5 39,109.5 40.5,109.5 49.5,109.5 52.5,109.5 54,109.5 55.5,109.5 58.5,109.5 60,109.5 61.5,109.5 63,109.5 64.5,109.5 66,109.5 67.5,109.5 69,109.5 70.5,109.5 72,109.5 73.5,109.5 75,109.5 76.5,109.5 78,109.5 79.5,109.5 81,109.5 82.5,109.5 84,109.5 85.5,109.5 87,109.5 88.5,109.5 90,109.5 91.5,109.5 93,109.5 94.5,109.5 96,109.5 97.5,109.5 99,109.5 100.5,109.5 102,109.5 103.5,109.5 105,109.5 108,109.5 109.5,109.5 111,109.5 112.5,109.5 114,109.5 115.5,109.5 117,109.5 118.5,109.5 121.5,109.5 57.768,109.816 55.832,109.993 57.592,110.498 55.415,110.561 30.75,111 32.25,111 33.75,111 35.25,111 36.75,111 39.75,111 41.25,111 42.75,111 44.25,111 47.25,111 50.25,111 51.75,111 53.25,111 54.75,111 57.75,111 59.25,111 60.75,111 62.25,111 63.75,111 65.25,111 66.75,111 68.25,111 69.75,111 71.25,111 72.75,111 74.25,111 75.75,111 77.25,111 78.75,111 80.25,111 83.25,111 84.75,111 86.25,111 87.75,111 89.25,111 90.75,111 95.25,111 96.75,111 98.25,111 99.75,111 101.25,111 102.75,111 104.25,111 108.75,111 113.25,111 114.75,111 116.25,111 117.75,111 119.25,111 120.75,111 57.28,111.13 54.42,111.556 56.853,111.689 53.896,112.027 56.355,112.187 53.236,112.272 51.124,112.296 51.828,112.296 52.532,112.296 31.5,112.5 40.5,112.5 42,112.5 57,112.5 58.5,112.5 60,112.5 61.5,112.5 63,112.5 64.5,112.5 66,112.5 67.5,112.5 69,112.5 70.5,112.5 72,112.5 73.5,112.5 75,112.5 76.5,112.5 78,112.5 79.5,112.5 81,112.5 82.5,112.5 84,112.5 85.5,112.5 87,112.5 88.5,112.5 90,112.5 96,112.5 97.5,112.5 99,112.5 100.5,112.5 102,112.5 103.5,112.5 105,112.5 106.5,112.5 108,112.5 111,112.5 112.5,112.5 114,112.5 115.5,112.5 117,112.5 118.5,112.5 120,112.5 55.857,112.684 55.358,113.181 54.162,113.911 54.75,114 56.25,114 57.75,114 59.25,114 60.75,114 62.25,114 63.75,114 65.25,114 66.75,114 68.25,114 69.75,114 71.25,114 72.75,114 74.25,114 75.75,114 77.25,114 78.75,114 80.25,114 81.75,114 93.75,114 95.25,114 96.75,114 98.25,114 99.75,114 101.25,114 102.75,114 104.25,114 105.75,114 107.25,114 113.25,114 114.75,114 116.25,114 117.75,114 119.25,114 120.75,114 53.479,114.08 51.367,114.11 52.071,114.11 52.775,114.11 31.5,115.5 33,115.5 34.5,115.5 36,115.5 37.5,115.5 39,115.5 40.5,115.5 42,115.5 46.5,115.5 48,115.5 49.5,115.5 51,115.5 52.5,115.5 54,115.5 55.5,115.5 57,115.5 58.5,115.5 60,115.5 61.5,115.5 63,115.5 64.5,115.5 66,115.5 67.5,115.5 69,115.5 70.5,115.5 72,115.5 73.5,115.5 75,115.5 76.5,115.5 78,115.5 79.5,115.5 81,115.5 82.5,115.5 84,115.5 85.5,115.5 87,115.5 88.5,115.5 90,115.5 91.5,115.5 94.5,115.5 96,115.5 97.5,115.5 99,115.5 100.5,115.5 102,115.5 103.5,115.5 105,115.5 106.5,115.5 108,115.5 111,115.5 112.5,115.5 114,115.5 115.5,115.5 117,115.5 120,115.5 30.75,117 32.25,117 33.75,117 35.25,117 36.75,117 38.25,117 39.75,117 41.25,117 42.75,117 44.25,117 45.75,117 47.25,117 48.75,117 50.25,117 51.75,117 53.25,117 54.75,117 56.25,117 57.75,117 59.25,117 60.75,117 62.25,117 63.75,117 65.25,117 66.75,117 68.25,117 69.75,117 71.25,117 72.75,117 74.25,117 75.75,117 77.25,117 78.75,117 80.25,117 81.75,117 83.25,117 84.75,117 86.25,117 87.75,117 89.25,117 90.75,117 92.25,117 93.75,117 96.75,117 99.75,117 102.75,117 105.75,117 107.25,117 108.75,117 110.25,117 111.75,117 113.25,117 114.75,117 116.25,117 117.75,117 119.25,117 120.75,117 27,118.5 28.5,118.5 30,118.5 31.5,118.5 33,118.5 34.5,118.5 36,118.5 37.5,118.5 39,118.5 40.5,118.5 42,118.5 43.5,118.5 45,118.5 46.5,118.5 48,118.5 49.5,118.5 51,118.5 52.5,118.5 54,118.5 55.5,118.5 57,118.5 58.5,118.5 60,118.5 61.5,118.5 63,118.5 64.5,118.5 66,118.5 67.5,118.5 69,118.5 70.5,118.5 72,118.5 73.5,118.5 75,118.5 76.5,118.5 78,118.5 79.5,118.5 81,118.5 82.5,118.5 84,118.5 85.5,118.5 87,118.5 88.5,118.5 94.5,118.5 97.5,118.5 106.5,118.5 108,118.5 120,118.5 26.25,120 27.75,120 29.25,120 30.75,120 32.25,120 33.75,120 35.25,120 36.75,120 38.25,120 39.75,120 41.25,120 42.75,120 44.25,120 45.75,120 47.25,120 48.75,120 50.25,120 51.75,120 53.25,120 54.75,120 56.25,120 57.75,120 59.25,120 60.75,120 62.25,120 63.75,120 65.25,120 66.75,120 68.25,120 69.75,120 71.25,120 72.75,120 74.25,120 75.75,120 77.25,120 78.75,120 80.25,120 81.75,120 83.25,120 84.75,120 86.25,120 87.75,120 89.25,120 92.25,120 93.75,120 96.75,120 98.25,120 104.25,120 107.25,120 108.75,120 110.25,120 111.75,120 113.25,120 114.75,120 116.25,120 117.75,120 119.25,120 120.75,120 27,121.5 28.5,121.5 30,121.5 31.5,121.5 33,121.5 34.5,121.5 36,121.5 37.5,121.5 39,121.5 40.5,121.5 42,121.5 43.5,121.5 45,121.5 46.5,121.5 48,121.5 49.5,121.5 51,121.5 52.5,121.5 54,121.5 55.5,121.5 57,121.5 58.5,121.5 60,121.5 61.5,121.5 63,121.5 64.5,121.5 66,121.5 67.5,121.5 69,121.5 70.5,121.5 72,121.5 73.5,121.5 75,121.5 76.5,121.5 78,121.5 79.5,121.5 84,121.5 91.5,121.5 97.5,121.5 99,121.5 106.5,121.5 115.5,121.5 117,121.5 118.5,121.5 120,121.5 26.25,123 27.75,123 29.25,123 30.75,123 32.25,123 33.75,123 35.25,123 36.75,123 38.25,123 39.75,123 41.25,123 42.75,123 44.25,123 45.75,123 47.25,123 48.75,123 50.25,123 51.75,123 53.25,123 54.75,123 56.25,123 57.75,123 59.25,123 60.75,123 62.25,123 63.75,123 65.25,123 66.75,123 68.25,123 69.75,123 71.25,123 72.75,123 74.25,123 75.75,123 77.25,123 78.75,123 80.25,123 83.25,123 87.75,123 89.25,123 90.75,123 92.25,123 96.75,123 98.25,123 101.25,123 102.75,123 104.25,123 105.75,123 107.25,123 108.75,123 110.25,123 111.75,123 113.25,123 114.75,123 116.25,123 117.75,123 119.25,123 27,124.5 28.5,124.5 30,124.5 31.5,124.5 33,124.5 34.5,124.5 36,124.5 37.5,124.5 39,124.5 40.5,124.5 42,124.5 43.5,124.5 45,124.5 46.5,124.5 48,124.5 49.5,124.5 51,124.5 52.5,124.5 54,124.5 55.5,124.5 57,124.5 58.5,124.5 60,124.5 61.5,124.5 63,124.5 64.5,124.5 66,124.5 67.5,124.5 69,124.5 70.5,124.5 72,124.5 73.5,124.5 75,124.5 76.5,124.5 78,124.5 79.5,124.5 81,124.5 84,124.5 85.5,124.5 87,124.5 88.5,124.5 90,124.5 91.5,124.5 93,124.5 99,124.5 100.5,124.5 102,124.5 103.5,124.5 105,124.5 106.5,124.5 108,124.5 109.5,124.5 114,124.5 115.5,124.5 117,124.5 118.5,124.5 121.5,124.5 26.25,126 27.75,126 29.25,126 30.75,126 32.25,126 33.75,126 35.25,126 36.75,126 38.25,126 39.75,126 41.25,126 42.75,126 44.25,126 45.75,126 47.25,126 48.75,126 50.25,126 51.75,126 53.25,126 54.75,126 56.25,126 57.75,126 59.25,126 60.75,126 62.25,126 63.75,126 65.25,126 66.75,126 68.25,126 69.75,126 71.25,126 72.75,126 74.25,126 75.75,126 77.25,126 78.75,126 80.25,126 81.75,126 83.25,126 84.75,126 86.25,126 87.75,126 89.25,126 90.75,126 92.25,126 93.75,126 95.25,126 96.75,126 98.25,126 99.75,126 101.25,126 102.75,126 104.25,126 105.75,126 107.25,126 108.75,126 110.25,126 111.75,126 113.25,126 114.75,126 116.25,126 117.75,126 119.25,126 120.75,126 122.25,126
  other v3: 95.504,38.989 84.074,39.37 42.627,41.06 43.737,41.07 42.647,42.17 43.697,42.18 79.248,51.689 93.853,52.959 69.795,60.501 70.905,60.541 70.895,61.591 69.785,61.611 52.152,70.483 51.112,70.513 52.112,71.533 51.102,71.543 74.833,79.298 75.923,79.298 74.743,80.358 75.863,80.388 74.549,86.741 78.359,86.741
  other v4: 56.219,41.614 57.319,41.614 57.319,42.714 94.099,96.646 95.199,96.646 94.099,97.746 95.199,97.746
IF_N: L8.1 R12.2 U5.21 | length 4.8
  Top Layer w0.381: L8.1@55.626,35.687 55.618,35.695 R12.2@55.618,37.211 55.618,37.848 cw(c56.513,37.848) 55.88,38.481 56.098,38.699 ccw(c55.081,39.716) 56.519,39.716 U5.21@56.519,40.214
IF_P: L9.1 R11.2 U5.20 | length 6.1
  Top Layer w0.381: L9.1@53.975,35.695 cw(c54.262,35.982) 53.856,35.982 R11.2@53.856,37.084 53.856,38.321 cw(c54.262,38.321) 53.975,38.608 54.176,38.809 cw(c54.61,38.376) 54.61,38.989 55.446,38.989 ccw(c55.446,39.423) 55.753,39.116 ccw(c55.111,39.758) 56.019,39.758 U5.20@56.019,40.214
MIX_EN: J1.17 U5.9 | length 99.1
  Top Layer w0.25: U5.9@57.019,44.114 57.023,44.118 v2(57.023,44.958)
  Bottom Layer w0.25: v2(57.023,44.958) 55.372,43.307 53.467,43.307 51.562,45.212 51.562,56.879 72.236,77.553 72.798,77.553 72.969,77.724 75.946,77.724 79.629,81.407 109.728,81.407 J1.17@117.729,73.406
NetC1_1: C1.1 R3.2 R4.2 | length 7.8
  Top Layer w0.2: C1.1@72.644,85.86 72.644,86.995 73.025,87.376 76.327,87.376 76.454,87.249 ; R3.2@76.454,85.86 76.454,87.249 ; R4.2@76.454,88.503 76.454,87.249
NetC1_2: C1.2 C3.1 R2.1 U3.24 | length 7.9
  Top Layer w0.2: C3.1@69.977,86.479 69.977,84.344 R2.1@69.993,84.328
  Top Layer w0.25: C1.2@72.644,84.32 72.644,83.439 74.069,82.014 U3.24@74.069,81.788
  Top Layer w0.5: R2.1@69.993,84.328 72.636,84.328 C1.2@72.644,84.32
NetC5_1: C5.1 R6.2 U2.22 | length 6.4
  Top Layer w0.25: R6.2@51.3,79.121 C5.1@51.3,76.581 51.3,73.533 51.312,73.521 U2.22@51.312,72.693
NetC6_2: C6.2 U3.4 | length 3.4
  Top Layer w0.25: C6.2@69.993,79.756 72.263,79.756 72.481,79.538 U3.4@73.323,79.538
NetC7_1: C7.1 C8.2 R5.1 R5.2 U2.16 | length 32.7
  Top Layer w0.16: R5.1@67.564,67.556 62.147,67.556 cw(c62.147,70.096) 60.351,68.3 60.325,68.326 60.351,68.352 cw(c62.147,66.556) 62.147,69.096 R5.2@67.564,69.096
  Top Layer w0.345: U2.16@53.262,71.243 54.705,71.243 cw(c54.705,68.703) 56.501,70.499 57.93,69.07 ccw(c59.726,70.866) 59.726,68.326 60.325,68.326 ; R5.1@67.564,67.556 70.573,67.556 ccw(c70.573,67.611) C7.1@70.612,67.572 ; R5.2@67.564,69.096 68.425,69.096 ccw(c68.425,71.636) 70.221,69.84 70.376,69.995 ccw(c68.58,71.791) 71.12,71.791 C8.2@71.12,73.398
NetC7_2: C7.2 U4.2 | length 3.5
  Top Layer w0.345: U4.2@70.612,62.484 C7.2@70.612,66.032
NetC8_1: C8.1 U3.5 | length 5.6
  Top Layer w0.345: C8.1@71.12,74.938 71.12,77.387 cw(c72.854,77.387) 71.628,78.613 cw(c72.654,77.587) 72.654,79.038 U3.5@73.323,79.038
NetC14_1: C14.1 T1.4 | length 3.6
  Top Layer w0.345: C14.1@63.516,41.275 65.396,41.275 ccw(c65.396,43.443) T1.4@66.929,41.91
NetC14_2: C14.2 U5.3 | length 3.4
  Top Layer w0.345: U5.3@58.719,41.914 59.269,41.914 cw(c59.269,40.6) 60.198,41.529 ccw(c60.811,42.142) 60.811,41.275 C14.2@61.976,41.275
NetC15_1: C15.1 T1.3 | length 3.6
  Top Layer w0.345: C15.1@63.5,42.926 65.703,42.926 cw(c65.703,41.192) T1.3@66.929,42.418
NetC15_2: C15.2 U5.4 | length 3.4
  Top Layer w0.345: U5.4@58.719,42.414 59.575,42.414 ccw(c59.575,43.295) 60.198,42.672 cw(c60.811,42.059) 60.811,42.926 C15.2@61.96,42.926
NetC20_1: C20.1 T2.3 | length 2.2
  Top Layer w0.345: T2.3@48.006,41.91 ccw(c49.232,43.136) 49.232,41.402 C20.1@50.038,41.402
NetC20_2: C20.2 U5.16 | length 3
  Top Layer w0.345: C20.2@51.578,41.402 52.473,41.402 ccw(c52.473,42.269) 53.086,41.656 cw(c53.589,41.152) 53.589,41.864 U5.16@54.483,41.864
NetC21_2: C21.2 C22.2 R14.1 U5.11 | length 5.6
  Top Layer w0.22: C21.2@53.721,46.101 53.729,46.109 C22.2@53.729,47.752 ; R14.1@55.356,46.101 56.019,45.438 U5.11@56.019,44.114
  Top Layer w0.345: C21.2@53.721,46.101 R14.1@55.356,46.101
NetC24_1: C24.1 T2.4 | length 2.2
  Top Layer w0.345: T2.4@48.006,42.418 cw(c49.539,40.885) 49.539,43.053 C24.1@50.03,43.053
NetC24_2: C24.2 U5.15 | length 3.4
  Top Layer w0.345: C24.2@51.57,43.053 52.6,43.053 cw(c52.6,42.186) 53.213,42.799 ccw(c54.142,43.728) 54.142,42.414 U5.15@54.819,42.414
NetC29_1: C29.1 SMA1.1 | length 5.8
  Top Layer w0.345: SMA1.1@28.067,113.665 28.194,113.538 C29.1@33.782,113.538
NetC29_2: C29.2 C30.2 L1.2 U6.5 U6.6 | length 12.4
  Top Layer w0.345: C29.2@35.322,113.538 35.449,113.665 C30.2@44.323,113.665
  Top Layer w0.35: U6.6@45.856,113.203 44.785,113.203 C30.2@44.323,113.665 44.511,113.853 U6.5@45.856,113.853
NetC38_1: C38.1 SMA2.1 | length 7
  Top Layer w0.345: SMA2.1@27.94,41.91 C38.1@34.917,41.91
NetC38_2: C38.2 U7.2 | length 5.3
  Top Layer w0.345: C38.2@36.457,41.91 36.457,41.927 U7.2@41.777,41.927
NetC39_2: C39.2 C40.2 R14.2 R16.2 R18.1 U5.10 | length 8.8
  Top Layer w0.22: U5.10@56.519,44.114 56.513,44.12 56.513,45.337 56.896,45.72 R14.2@56.896,46.101 C40.2@58.412,46.101 58.547,46.236 C39.2@58.547,49.53 58.539,49.538 R18.1@58.539,51.181
NetC41_1: C41.1 D1.2 L3.1 R19.1 | length 21.8
  Top Layer w0.35: R19.1@102.989,91.948 C41.1@105.275,91.948 ; L3.1@103.251,87.884 103.251,91.186
  Top Layer w0.5: D1.2@96.188,101.854 98.552,101.854 v2(101.092,99.314) ; R19.1@102.989,91.948 102.989,91.829 v2(103.632,91.186)
  Bottom Layer w0.5: v2(101.092,99.314) 103.632,96.774 v2(103.632,91.186)
NetC44_1: C44.1 U8.8 | length 2.9
  Top Layer w0.35: C44.1@92.329,93.353 92.524,93.548 U8.8@92.524,96.221
NetC45_1: C45.1 R21.2 | length 3.3
  Top Layer w0.35: R21.2@98.298,91.44 98.298,88.146 C45.1@98.306,88.138
NetC46_1: C46.1 D2.K J2.1 J3.2 L4.1 | length 25.3
  Top Layer w0.4: D2.K@114.838,101.316 J2.1@119.466,101.316
  Top Layer w0.5: C46.1@109.982,97.29 L4.1@109.982,101.346 D2.K@114.808,101.346 114.838,101.316 119.253,96.901 J3.2@119.253,91.44
NetC49_1: C49.1 C50.1 C51.1 J4.1 L6.1 U9.3 | length 32
  Top Layer w0.5: L6.1@104.521,121.666 L6.1@104.394,121.793 102.489,119.888 99.568,119.888 98.552,118.872 C49.1@98.552,118.507 C50.1@101.473,118.507 104.349,118.507 C51.1@104.394,118.552 104.836,118.552 107.95,121.666 113.157,121.666 114.06,120.763 U9.3@114.06,118.11 J4.1@118.618,118.11
NetC55_1: C55.1 C56.1 L5.2 U9.1 | length 11.5
  Top Layer w0.5: L5.2@106.299,110.236 109.72,110.236 C56.1@109.847,110.363 109.601,110.609 C55.1@109.601,113.919 109.46,114.06 U9.1@109.46,118.11
NetC59_1: C59.1 C62.2 R24.2 U11.1 | length 9.1
  Top Layer w0.345: C59.1@81.661,42.299 81.78,42.418 R24.2@84.074,42.418 86.868,42.418 C62.2@87.503,43.053 87.503,42.901 U11.1@89.446,40.957
NetC59_2: C59.2 R24.1 R26.2 U11.2 | length 28.8
  Top Layer w0.345: R26.2@65.159,30.48 65.369,30.48 ccw(c65.369,33.02) 67.165,31.224 75.956,40.015 cw(c77.752,38.219) 77.752,40.759 C59.2@81.661,40.759 83.955,40.759 R24.1@84.074,40.878 86.079,40.878 86.313,41.113 87.204,41.113 87.986,40.331 89.438,40.331 U11.2@89.446,40.322
NetC60_1: C60.1 U12.16 | length 3.3
  Top Layer w0.2: C60.1@78.351,56.134 78.351,53.856 78.498,53.709 U12.16@78.498,52.889
NetC60_2: C60.2 U12.14 | length 3.4
  Top Layer w0.2: U12.14@79.498,52.889 79.502,52.893 79.502,53.594 79.891,53.983 C60.2@79.891,56.134
NetC61_1: C61.1 R26.1 | length 4.3
  Top Layer w0.345: C61.1@59.325,30.607 63.312,30.607 cw(c63.312,30.173) R26.1@63.619,30.48
NetC61_2: C61.2 C64.2 L8.2 | length 5.4
  Top Layer w0.345: L8.2@55.626,34.147 55.626,32.526 cw(c55.247,32.526) C64.2@55.515,32.258 55.515,31.742 ccw(c56.761,31.742) 55.88,30.861 ccw(c56.493,31.474) 56.493,30.607 C61.2@57.785,30.607
NetC62_1: C62.1 C63.2 R23.2 | length 16.5
  Top Layer w0.345: C62.1@89.043,43.053 C63.2@90.678,43.053 90.678,43.071 91.676,44.069 93.599,44.069 94.142,43.526 94.142,43.387 94.695,42.834 98.091,42.834 98.182,42.926 98.552,42.926 100.838,40.64 R23.2@100.838,37.973
NetC63_1: C63.1 R28.2 U11.12 | length 12.6
  Top Layer w0.345: v2(92.202,42.037) 92.329,42.037 92.218,42.148 C63.1@92.218,43.053 ; R28.2@92.464,32.385 92.464,36.43 91.983,36.91 91.983,37.512 92.464,37.992 92.464,38.137 ; v2@92.736,38.409 94.188,38.409 U11.12@94.196,38.417
  Bottom Layer w0.345: v2(92.202,42.037) 92.202,38.862 92.583,38.481 v2(92.583,38.417)
NetC64_1: C64.1 C65.2 L9.2 | length 7.7
  Top Layer w0.345: L9.2@53.975,34.155 C64.1@53.975,32.258 53.975,31.913 ccw(c56.515,31.913) 54.719,30.117 55.136,29.7 ccw(c56.932,31.496) 56.932,28.956 C65.2@57.769,28.956
NetC65_1: C65.1 R30.1 | length 4.3
  Top Layer w0.345: C65.1@59.309,28.956 63.312,28.956 cw(c63.312,28.522) R30.1@63.619,28.829
NetC66_1: C66.1 C67.2 R34.2 | length 16.3
  Top Layer w0.345: C66.1@84.074,32.877 84.439,32.512 R34.2@86.868,32.512 86.868,30.734 87.503,30.099 v2(87.63,30.099) ; v2(95.758,32.639) 96.917,32.639 C67.2@97.028,32.75
  Bottom Layer w0.345: v2(87.63,30.099) 93.229,30.099 94.072,30.941 94.072,30.953 v2(95.758,32.639)
NetC66_2: C66.2 C68.1 R33.2 U11.7 | length 9.4
  Top Layer w0.345: C68.1@81.661,36.687 84.066,36.687 R33.2@84.074,36.695 ; C66.2@84.074,34.417 R33.2@84.074,36.695 ; U11.7@88.646,37.12 87.412,37.12 86.987,36.695 R33.2@84.074,36.695
NetC67_1: C67.1 R29.1 U11.14 | length 19.5
  Top Layer w0.345: U11.14@94.205,39.679 U11.14@94.196,39.688 95.694,39.688 v2(95.758,39.624) 96.393,38.989 v2(99.568,38.989) ; R29.1@94.48,46.482 94.488,46.474 v2(94.488,45.212) ; C67.1@97.028,34.29 v2(98.171,34.29)
  Bottom Layer w0.345: v2(94.488,45.212) 95.758,43.942 v2(95.758,39.624) ; v2(98.171,34.29) 99.568,35.687 v2(99.568,38.989)
NetC68_2: C68.2 R30.2 R33.1 U11.6 | length 28.2
  Top Layer w0.345: R30.2@65.159,28.829 66.766,28.829 ccw(c66.766,31.369) 68.562,29.573 76.581,37.592 cw(c78.114,36.059) 78.114,38.227 C68.2@81.661,38.227 84.066,38.227 R33.1@84.074,38.235 87.114,38.235 87.575,37.774 89.438,37.774 U11.6@89.446,37.782
NetC69_1: C69.1 U13.39 | length 2.5
  Top Layer w0.22: C69.1@88.392,57.658 U13.39@90.903,57.658
NetC70_1: C70.1 C71.2 C72.2 U13.37 | length 11.6
  Top Layer w0.22: C72.2@81.28,59.174 C71.2@84.582,59.174 ; C70.1@84.463,57.277 84.463,58.887 cw(c84.869,58.887) C71.2@84.582,59.174 ; U13.37@90.903,59.258 cw(c90.7,59.461) 90.7,59.174 C71.2@84.582,59.174
NetC71_1: C71.1 C72.1 C73.1 U13.36 | length 13
  Top Layer w0.22: C72.1@81.28,60.714 C71.1@84.582,60.714 ; C73.1@84.59,63.627 84.59,60.722 C71.1@84.582,60.714 ; U13.36@90.903,60.058 89.522,60.058 89.281,59.817 86.995,59.817 86.098,60.714 C71.1@84.582,60.714
NetD1_1: D1.1 L2.2 U8.5 | length 10.6
  Top Layer w0.5: L2.2@86.106,101.391 86.569,101.854 D1.1@92.788,101.854 92.788,98.489 U8.5@92.524,98.225
NetL7_1: L7.1 U10.3 | length 7.6
  Top Layer w0.5: L7.1@85.471,122.047 89.154,122.047 90.805,120.396 90.805,118.857 U10.3@90.791,118.843
NetR1_1: R1.1 U3.23 | length 2.5
  Top Layer w0.2: R1.1@74.549,84.312 74.552,84.309 74.552,81.809 U3.23@74.573,81.788
NetR2_2: R2.2 U1.3 | length 5.7
  Top Layer w0.25: U1.3@62.752,84.328 R2.2@68.453,84.328
NetR3_1: R3.1 U3.20 | length 2.7
  Top Layer w0.2: U3.20@76.073,81.788 76.073,82.55 76.454,82.931 R3.1@76.454,84.32
NetR6_1: R6.1 R7.1 U1.1 | length 12.5
  Top Layer w0.25: R6.1@52.84,79.121 55.261,79.121 R7.1@55.372,79.232 61.579,79.232 62.738,80.391 62.738,82.414 U1.1@62.752,82.428
NetR7_2: R7.2 R9.2 U1.4 | length 7.7
  Top Layer w0.25: R7.2@55.372,80.772 55.499,80.899 R9.2@55.499,82.915
  Top Layer w0.345: R9.2@55.499,82.915 59.039,82.915 U1.4@60.452,84.328
NetR8_2: R8.2 U4.13 U4.15 | length 4.6
  Top Layer w0.345: U4.15@71.755,61.341 72.158,61.341 cw(c72.158,60.474) 72.771,61.087 cw(c72.158,60.474) 73.025,60.474 73.025,60.198 ; U4.13@71.757,60.204 71.763,60.198 73.025,60.198 ; R8.2@74.287,60.198 73.025,60.198
NetR10_1: R10.1 U4.8 | length 2.5
  Top Layer w0.345: R10.1@66.437,60.198 68.947,60.198 U4.8@68.953,60.204
NetR13_1: R13.1 R13.2 T1.1 U4.11 U6.3 | length 144.4
  Top Layer w0.16: R13.1@69.08,50.419 69.08,55.963 cw(c71.62,55.963) 69.824,57.759 69.876,57.707 cw(c68.08,55.911) 70.62,55.911 R13.2@70.62,50.419
  Top Layer w0.345: U6.3@50.156,113.203 53.004,113.203 cw(c53.004,110.663) 54.8,112.459 56.152,111.107 cw(c54.356,109.311) 56.896,109.311 56.896,108.621 cw(c54.356,108.621) 56.152,106.825 54.465,105.138 cw(c52.669,106.934) 52.669,104.394 41.819,104.394 ccw(c41.819,101.854) 40.023,103.65 35.161,98.788 ccw(c36.957,96.992) 34.417,96.992 34.417,65.06 ccw(c36.957,65.06) 35.161,63.264 39.388,59.037 ccw(c41.184,60.833) 41.184,58.293 60.496,58.293 cw(c60.496,56.559) 61.722,57.785 cw(c60.496,56.559) 62.23,56.559 62.23,54.693 ccw(c63.964,54.693) 62.738,53.467 62.871,53.334 cw(c61.354,51.816) 63.5,51.816 63.5,48.619 ccw(c64.367,48.619) 63.754,48.006 ccw(c64.674,48.926) 64.674,47.625 67.787,47.625 ccw(c67.787,48.926) 68.707,48.006 ccw(c67.806,48.907) 69.08,48.907 R13.1@69.08,50.419 ; T1.1@67.991,42.438 69.876,44.324 ccw(c68.08,46.12) 70.62,46.12 R13.2@70.62,50.419 ; 69.824,57.759 cw(c70.744,57.759) 70.093,58.409 70.485,58.801 ccw(c70.123,59.163) 70.635,59.163 U4.11@70.635,59.661
NetR15_2: R15.2 U7.13 U7.15 | length 6.4
  Top Layer w0.22: U7.15@42.897,43.03 42.897,44.794 R15.2@44.069,45.966 44.069,43.082 U7.13@44.017,43.03
NetR17_1: R17.1 U7.8 | length 2.3
  Top Layer w0.22: U7.8@44.017,40.23 44.069,40.178 R17.1@44.069,37.981
NetR19_2: R19.2 R20.1 U8.2 | length 8.2
  Top Layer w0.35: U8.2@96.774,96.871 98.522,96.871 98.552,96.901 100.584,94.869 R20.1@100.584,93.599 100.592,93.607 R19.2@102.87,93.607
NetR21_1: R21.1 U8.1 | length 4.8
  Top Layer w0.35: R21.1@96.758,91.44 96.774,91.456 U8.1@96.774,96.221
NetR23_1: R23.1 R25.1 U11.10 U12.1 | length 41.8
  Top Layer w0.2: v2(77.089,48.006) 77.089,51.796 77.701,52.408 78.017,52.408 U12.1@78.048,52.439 ; v2(92.71,37.211) 94.133,37.211 U11.10@94.196,37.148
  Top Layer w0.25: R25.1@98.552,36.433 R23.1@100.838,36.433
  Top Layer w0.345: U11.10@94.196,37.148 96.584,37.148 97.282,36.449 98.536,36.449 R25.1@98.552,36.433
  Bottom Layer w0.2: v2(77.089,48.006) 77.089,43.815 88.265,32.639 91.313,32.639 92.583,33.909 92.583,36.957 92.837,37.211 v2(92.71,37.211)
NetR25_2: R25.2 R27.1 U11.11 | length 13
  Top Layer w0.345: U11.11@94.196,37.782 94.205,37.791 98.552,37.791 R25.2@98.552,37.973 ; v2(97.79,43.561) R27.1@97.79,44.577
  Bottom Layer w0.345: v2(97.409,37.719) 97.409,37.857 99.267,39.716 99.406,39.716 99.441,39.751 99.441,40.386 97.79,42.037 v2(97.79,43.561)